# Altium PCB AeroBoard V1.PcbDoc
Units mil, origin at the board's own origin, x right, y up, seen from the top; angles counter-clockwise.
Board outline 3464.57 x 1417.32 mil, 2 copper layers (Top Layer, Bottom Layer); 13 components, 12 nets, 73 pads, 9 vias.
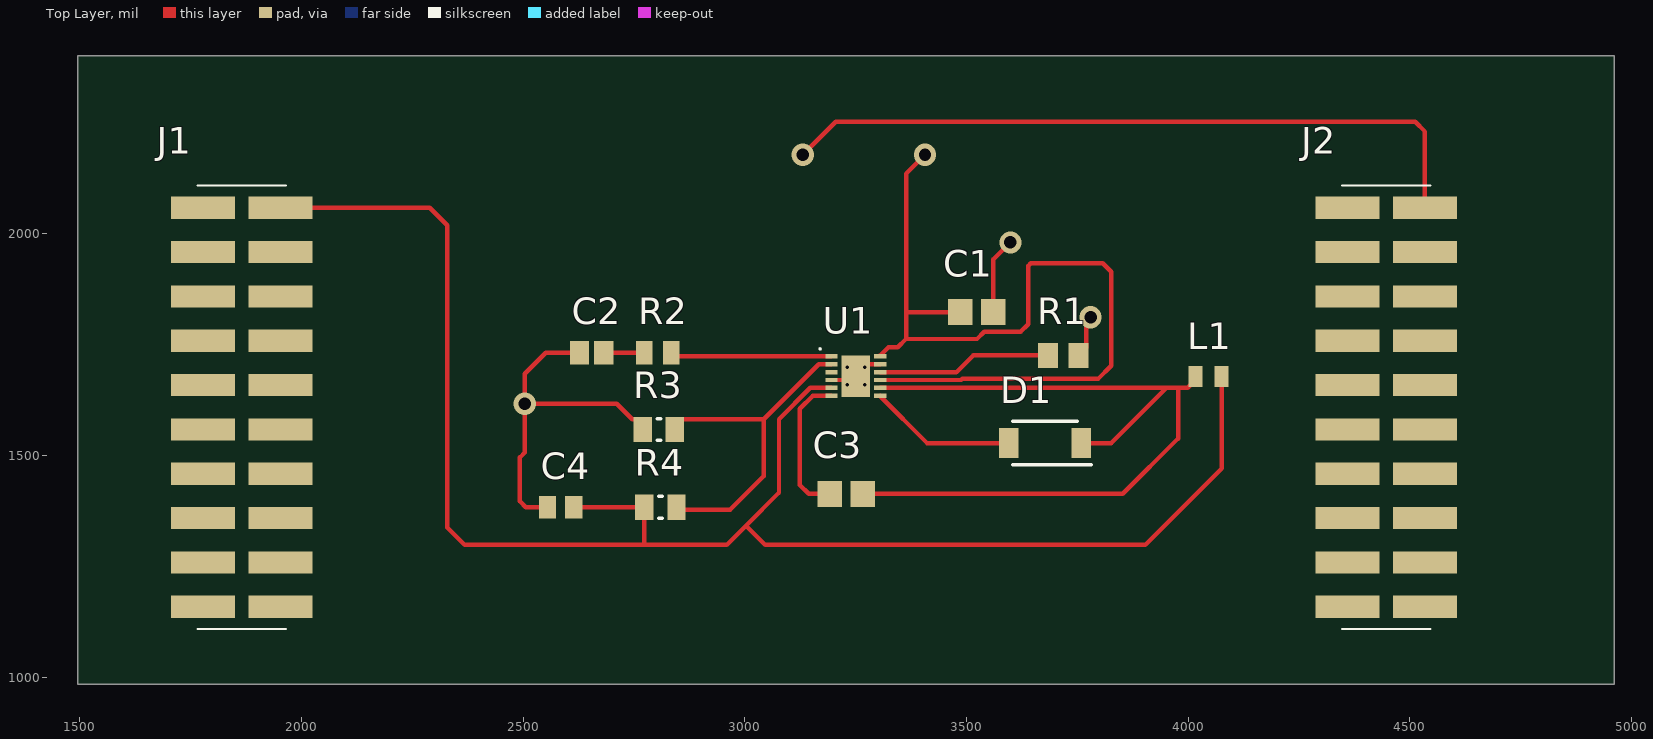
[diagram p0: Top Layer view]
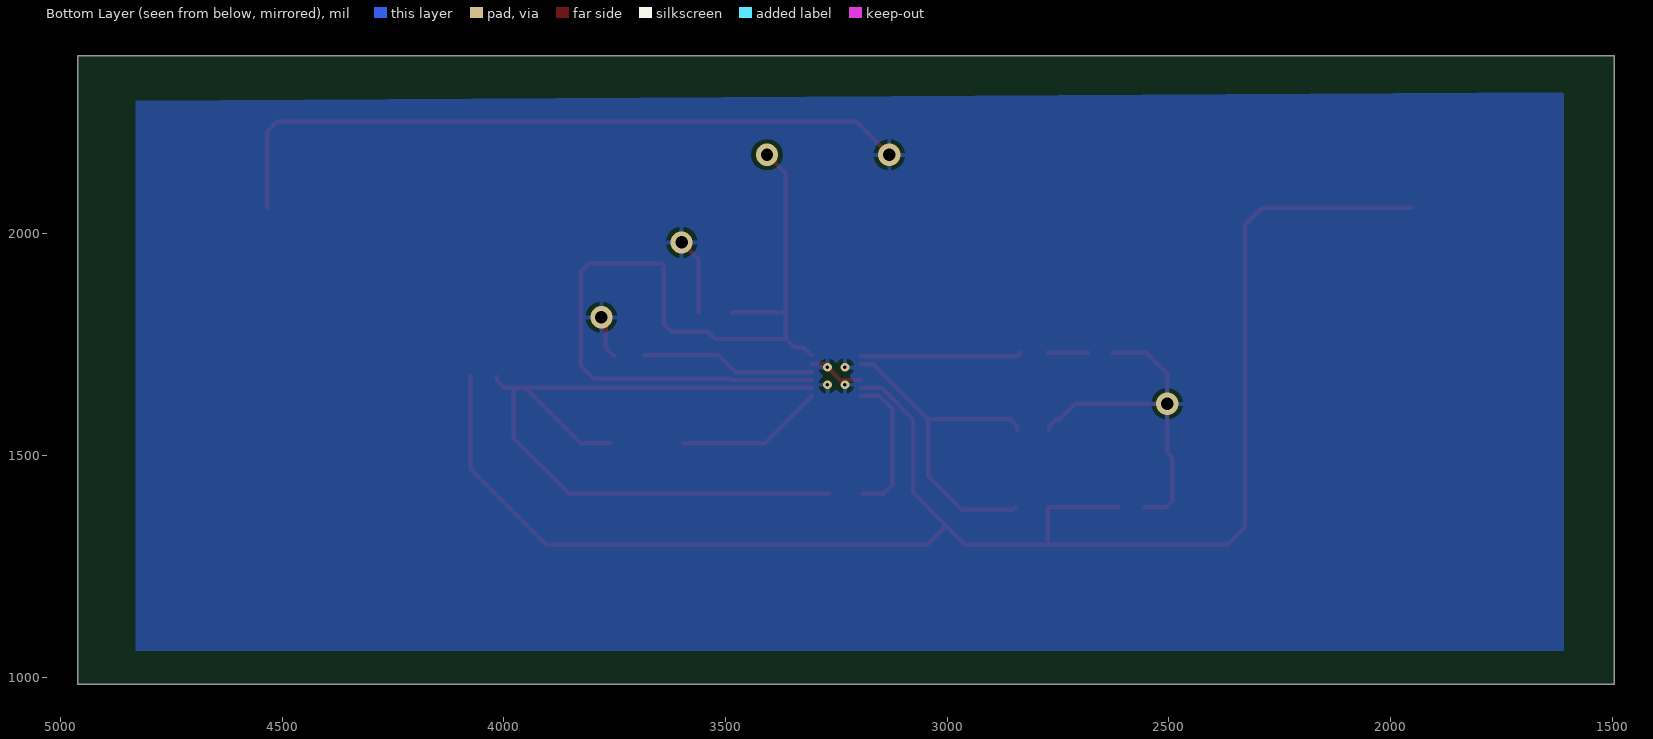
[diagram p1: Bottom Layer view, seen from below]

## Layer stack, top to bottom
Top Solder: solder mask 0.4, Solder Resist, Dk 3.5
Top Layer: signal copper 1.4
Dielectric 1: dielectric 12.6, FR-4, Dk 4.8
Bottom Layer: signal copper 1.4
Bottom Solder: solder mask 0.4, Solder Resist, Dk 3.5

## Board outline
1496.06,984.25 4960.63,984.25 4960.63,2401.57 1496.06,2401.57

## Design rules (kind name [scope] priority, off if disabled: settings)
Clearance [All] p1: gap=10 ignorepadtopadclearanceinfootprint=TRUE except(0: Arc-Hole Track-Hole SMDPad-Hole THPad-Hole Via-Hole Fill-Hole Poly-Hole Region-Hole Text-Hole; 5: Arc-Arc Arc-Track Arc-SMDPad Arc-THPad Arc-Via Arc-Fill Arc-Poly Arc-Region Track-Track Track-SMDPad Track-THPad Track-Via Track-Fill Track-Poly Track-Region)
PolygonConnect [All] p1: connectstyle=Relief reliefconductorwidth=10 reliefentries=4 polygonreliefangle="90 Angle" airgapwidth=10
RoomDefinition "AeroBoard V1" [InComponentClass('AeroBoard V1')] p1: confinementstyle=ConfineIn formatcopy=TRUE lockcomponents=FALSE outline 1694.09,1083.86 4789.09,1083.86 4789.09,2283.86 1694.09,2283.86
RoutingVias [All] p1: holewidth=28 width=50 viastyle="Through Hole" minholewidth=28 minwidth=50 maxholewidth=28 maxwidth=50
SolderMaskExpansion [All] p1: expansion=4
Width [All] p1: maxlimit=10 minlimit=10 preferedwidth=10
30 further rules are at their usual default settings.

## Components (designator, comment, footprint, x,y, rotation, side; value= is the part's Value field where it differs from the comment)
C1 "2.2uF" CAPC2013X135X50ML10T20 3523.23,1823.86 r180 top
C2 "470pF" CAPC2013X145X50LL20T25 2654.65,1732.28 r0 top
C3 ".22uF" CAPC2013X135X45ML10T25 3229.09,1413.86 r0 top
C4 "10uF" CAPC2013X135X50LL10T20 2584.65,1383.86 r0 top
D1 "RBR5LAM60ATR" SODFL4725X105N 3677.32,1528.43 r180 top
J1 "15-91-0200" 15910200 1865.47,1609.29 r270 top
J2 "15-91-0200" 15910200 4446.57,1609.29 r270 top
L1 "MLZ2012N100LT" TDK-IND0805-125_V 4046.1,1678.43 r0 top
R1 "40.2kΩ" RESC2013X70X40NL20T20 3718.11,1726.06 r180 top
R2 "16.2kΩ" RESC2013X70X40LL20T20 2804.13,1732.28 r0 top
R3 "102kΩ" RESC2013X50X30NL20T20 2806.06,1558.86 r0 top
R4 "536kΩ" RESC2013X50X30NL20T20 2809.65,1383.86 r0 top
U1 "LT3682IDD#PBF" LT-DD-12_V 3250.51,1679.57 r0 top

## Footprints (in the part's own frame and the unit in brackets; to place one, negate y for a bottom-side part, rotate by r counter-clockwise, add the part's x,y. Pads: shape width x height; smd on the part's side, far side on the other; paste and mask are expansions set on the pad)
15910200 [mm]
  rect 1.27x3.68 smd: 1(-11.43,-2.22) 2(-11.43,2.22) 3(-8.89,-2.22) 4(-8.89,2.22) 5(-6.35,-2.22) 6(-6.35,2.22) 7(-3.81,-2.22) 8(-3.81,2.22) 9(-1.27,-2.22) 10(-1.27,2.22) 11(1.27,-2.22) 12(1.27,2.22) 13(3.81,-2.22) 14(3.81,2.22) 15(6.35,-2.22) 16(6.35,2.22) 17(8.89,-2.22) 18(8.89,2.22) 19(11.43,-2.22) 20(11.43,2.22)
  silkscreen extent -12.7,-2.54 12.7,2.54, body extent -12.38,-3.71 13.02,3.28, height 9.65
CAPC2013X135X45ML10T25 [mm] "Chip Capacitor, 2-Leads, Body 2.00x1.25mm, IPC Low Density"
  rect 1.4x1.5 smd: 1(-0.95,0) 2(0.95,0)
  body extent -1.05,-0.67 1.05,0.67, height 1.35
CAPC2013X135X50LL10T20 [mm] "Chip Capacitor, 2-Leads, Body 2.00x1.25mm, IPC High Density"
  rect 1x1.3 smd: 1(-0.75,0) 2(0.75,0)
  body extent -1.05,-0.67 1.05,0.68, height 1.35
CAPC2013X135X50ML10T20 [mm] "Chip Capacitor, 2-Leads, Body 2.00x1.25mm, IPC Low Density"
  rect 1.4x1.5 smd: 1(-0.95,0) 2(0.95,0)
  body extent -1.05,-0.67 1.05,0.67, height 1.35
CAPC2013X145X50LL20T25 [mm] "Chip Capacitor, 2-Leads, Body 2.00x1.25mm, IPC High Density"
  rect 1.1x1.35 smd: 1(-0.7,0) 2(0.7,0)
  body extent -1.1,-0.72 1.1,0.72, height 1.45
LT-DD-12_V [mm] "SON, 12-Leads, Body 3x3mm, Pitch 0.45mm, Thermal Pad 2.38x1.65mm"
  rect 0.7x0.25 smd: 1(-1.4,1.125) 2(-1.4,0.675) 3(-1.4,0.225) 4(-1.4,-0.225) 5(-1.4,-0.675) 6(-1.4,-1.125) 7(1.4,-1.125) 8(1.4,-0.675) 9(1.4,-0.225) 10(1.4,0.225) 11(1.4,0.675) 12(1.4,1.125)
  rect 1.65x2.38 smd: 13(0,0)
  silkscreen extent -2.1,1.5 -2,1.6, body extent -1.5,-1.5 1.5,1.5, height 0.8
RESC2013X50X30NL20T20 [mm] "Chip Resistor, 2-Leads, Body 2.00x1.25mm, IPC Medium Density"
  rect 1.05x1.45 smd: 1(-0.925,0) 2(0.925,0)
  silkscreen extent -0.1,-0.63 0.1,0.63, body extent -1.1,-0.72 1.1,0.72, height 0.5
RESC2013X70X40LL20T20 [mm] "Chip Resistor, 2-Leads, Body 2.00x1.25mm, IPC High Density"
  rect 0.95x1.35 smd: 1(-0.775,0) 2(0.775,0)
  body extent -1.1,-0.72 1.1,0.72, height 0.7
RESC2013X70X40NL20T20 [mm] "Chip Resistor, 2-Leads, Body 2.00x1.25mm, IPC Medium Density"
  rect 1.15x1.45 smd: 1(-0.875,0) 2(0.875,0)
  body extent -1.1,-0.72 1.1,0.72, height 0.7
SODFL4725X105N [mm]
  rect 1.12x1.72 smd: 1(-2.075,0) 2(2.075,0)
  silkscreen extent -2.64,-1.25 1.85,1.25
TDK-IND0805-125_V [mm] "Chip Inductor, 2-Leads, Body 2.0x1.2mm, Height 1.25mm"
  rect 0.8x1.2 smd: 1(-0.75,0) 2(0.75,0)
  body extent -1.1,-0.7 1.1,0.7, height 1.25

## Part data
C1: library part CMP-2007-03455-1, Manufacturer=Murata, Part Number=GRM21BR71C225KA12L
C2: library part CMP-2007-01105-1, Manufacturer=Kemet, Part Number=C0805C471K5RAC7800
C3: library part CMP-2007-03524-1, Manufacturer=Murata, Part Number=GRM21BF51E474ZA01L
C4: library part CMP-2007-03453-1, Manufacturer=Murata, Part Number=GRM21BR61C106KE15L
D1: "Schottky Diode", Manufacturer_Name="ROHM Semiconductor", Mouser Part Number=755-RBR5LAM60ATR, Datasheet Link=https://componentsearchengine.com/Datasheets/1/RBR5LAM60ATR.pdf, Height=1.05mm, Manufacturer_Part_Number=RBR5LAM60ATR, Mouser Price/Stock=https://www.mouser.com/Search/Refine.aspx?Keyword=755-RBR5LAM60ATR
J1 J2: "Connector", Manufacturer_Name=Molex, Mouser Part Number=538-15-91-0200, Datasheet Link=https://componentsearchengine.com/Datasheets/1/15-91-0200.pdf, Height=9.66mm, Manufacturer_Part_Number=15-91-0200, Mouser Price/Stock=https://www.mouser.com/Search/Refine.aspx?Keyword=538-15-91-0200
L1: library part CMP-0266-00001-1, "Multilayer Inductor, 10 uH, ±20%, 300 mOhm, 50MHz, 0805(2012)", DC Resistance="0.3 Ohm", ComponentLink1Description="Manufacturer URL", ComponentLink1URL=http://www.global.tdk.com/, ComponentLink2Description=Datasheet, ComponentLink2URL=http://www.tdk.co.jp/tcfx01/c533_mlz.pdf, DatasheetVersion=05/2013, Mounting Technology="Suface Mount", PackageDescription="2-Pin SMT Inductor, 2 x 1.25 mm Body", PackageReference=IND0805-125, PartNumber=MLZ2012N100LT
R1: library part CMP-2001-00169-1, Manufacturer=Panasonic, Part Number=ERJ-6ENF4022V
R2: library part CMP-2001-04454-1, Manufacturer=Panasonic, Part Number=ERJ-6ENF1622V
R3: library part CMP-2001-04904-1, Manufacturer="Vishay Dale", Part Number=CRCW0805102KFKEA
R4: library part CMP-2001-04002-1, Manufacturer="Vishay Dale", Part Number=CRCW0805536KFKEA
U1: library part CMP-0491-00243-1, "1 A Micropower Step-Down Switching Regulator, 12-pin SON (DD-12), -40 to 125 degC, Pb-Free", Frequency Adjust Range="250kHz - 2.2MHz", Manufacturer="Linear Technology", Over Voltage Protection(V)=60, ComponentLink1Description="Manufacturer URL", ComponentLink1URL=http://www.linear.com/, ComponentLink2Description=Datasheet, ComponentLink2URL=http://cds.linear.com/docs/en/datasheet/3682f.pdf, ComponentLink3Description="Package Specification", ComponentLink3URL=http://cds.linear.com/docs/en/packaging/DFN_12_05-08-1725.pdf, Mounting Technology="Surface Mount", Number of Outputs=1, PackageDescription="12-Pin Plastic DFN, Body 3 x 3 mm, Pitch 0.45 mm", PackageReference=DD-12, PackageVersion="Rev. A, 06/2010", PartNumber=LT3682IDD#PBF, RoHS=TRUE

## Via types
v1: diameter 50, hole 28, Top Layer to Bottom Layer, 5 vias
v2: diameter 19.68, hole 7.87, Top Layer to Bottom Layer, 4 vias

## Nets (pads, with @x,y where several pads share a name; then routed paths per layer and width w, separated by ;. In a path a pad name is that pad's centre, name@x,y a point inside that pad or via, vN(x,y) a via of type N, cw(c..) or ccw(c..) an arc to the next point about the centre after c; other vN are vias at no path point)
GND: C1.1 C2.1 C4.1 J2.2 R1.1 R3.1 U1.4 U1.11 U1.13 | length 2807.1
  Top Layer w10: C4.1 2506.14,1383.86 2493,1397 2493,1496.09 2504,1507.09 v1(2504,1617) ; C2.1 2551.28,1732.28 2504,1685 v1(2504,1617) ; R3.1 2769.65,1566.73 2753.98,1582.4 2746.1,1582.4 2711.5,1617 v1(2504,1617) ; v1(3130.87,2178.58) 3205.28,2252.99 4511.93,2252.99 4533.98,2230.95 J2.2 ; U1.4 3241.65,1670.71 U1.13 v2(3270.2,1699.25) 3277.09,1706.14 U1.11 ; C1.1 3560.63,1942.63 v1(3599,1981) ; R1.1 3770.2,1743.7 3770.2,1791.37 3780,1801.18 v1(3780,1812)
  other v2: 3230.83,1659.88 3270.2,1659.88 3230.83,1699.25
NetC2_2: C2.2 R2.1 | length 91.4
  Top Layer w10: C2.2 R2.1
NetC3_1: C3.1 U1.6 | length 330.9
  Top Layer w10: C3.1 3144.33,1413.86 3124.33,1433.86 3124.33,1605.91 3153.7,1635.28 U1.6
NetC3_2: C3.2 D1.1 L1.1 U1.8 | length 1846.6
  Top Layer w10: C3.2 3852.52,1413.86 3977.2,1538.54 3977.2,1652.99 ; U1.8 3951.1,1652.99 ; D1.1 3826.53,1528.43 3951.1,1652.99 ; L1.1 4016.57,1670.55 3999.02,1652.99 3977.2,1652.99 ; 3951.1,1652.99 3977.2,1652.99
NetC4_2: C4.2 J1.2 L1.2 R4.1 U1.5 | length 3814.7
  Top Layer w10: J1.2 2289.88,2059.29 2329.25,2019.92 2329.25,1338.03 2368.62,1298.66 2773,1298.66 ; C4.2 R4.1 2773.23,1298.89 2773,1298.66 ; U1.5 3147.87,1652.99 3077.28,1582.4 3077.28,1416.77 3002.76,1342.24 ; L1.2 4075.63,1471.29 3903,1298.66 3046.34,1298.66 3002.76,1342.24 ; 2773,1298.66 2959.17,1298.66 3002.76,1342.24
NetD1_2: D1.2 U1.7 | length 335.1
  Top Layer w10: U1.7 3305.63,1633.86 3411.06,1528.43 D1.2
NetJ1_2: 
NetJ2_2: 
NetR1_2: R1.2 U1.10 | length 393.6
  Top Layer w10: U1.10 3477.4,1688.43 3515.04,1726.06 R1.2
NetR2_2: R2.2 U1.1 | length 364.2
  Top Layer w10: R2.2 2843.07,1723.86 U1.1
NetR3_2: R3.2 R4.2 U1.2 | length 777.7
  Top Layer w10: R3.2 2842.48,1566.73 2858.15,1582.4 3042.87,1582.4 ; R4.2 2851.97,1377.95 2966.85,1377.95 3042.87,1453.98 3042.87,1582.4 ; U1.2 3166.61,1706.14 3042.87,1582.4
VCC: C1.2 U1.9 U1.12 | length 1993.3
  Top Layer w10: U1.9 3487.97,1670.71 3490.25,1672.99 3796.85,1672.99 3826.53,1702.68 3826.53,1914.68 3807.36,1933.86 3645.23,1933.86 3639.37,1928 3639.37,1796.57 3622.13,1779.33 3540.02,1779.33 3523.75,1763.06 3363.78,1763.06 ; U1.12@3305.63,1726.06 3324.13,1744.56 3345.28,1744.56 3363.78,1763.06 ; v1(3406.46,2178.58) 3363.78,2135.91 3363.78,1823.86 ; C1.2 3363.78,1823.86 ; 3363.78,1763.06 3363.78,1823.86
pads on no net: J1.1 J1.3 J1.4 J1.5 J1.6 J1.7 J1.8 J1.9 J1.10 J1.11 J1.12 J1.13 J1.14 J1.15 J1.16 J1.17 J1.18 J1.19 J1.20 J2.1 J2.3 J2.4 J2.5 J2.6 J2.7 J2.8 J2.9 J2.10 J2.11 J2.12 J2.13 J2.14 J2.15 J2.16 J2.17 J2.18 J2.19 J2.20 U1.3

## Polygon pours and split planes (outlines as drawn)
GND on Bottom Layer (solid, pour order 8): 4830,2300 4830,1060 1610,1060 1610,2320
GND on Bottom Layer (solid, pour order 4): 2743,1769